# Altium PCB hand_sense.PcbDoc
Units mil, origin at the board's own origin, x right, y up, seen from the top; angles counter-clockwise.
Board outline 3797.46 x 1463.31 mil, 4 copper layers (Top Layer, Int1 (GND), Int2 (PWR), Bottom Layer), stack 53.912 mil thick; 72 components, 54 nets, 328 pads, 179 vias.
Unrouted connection lines stored in the file: 152.
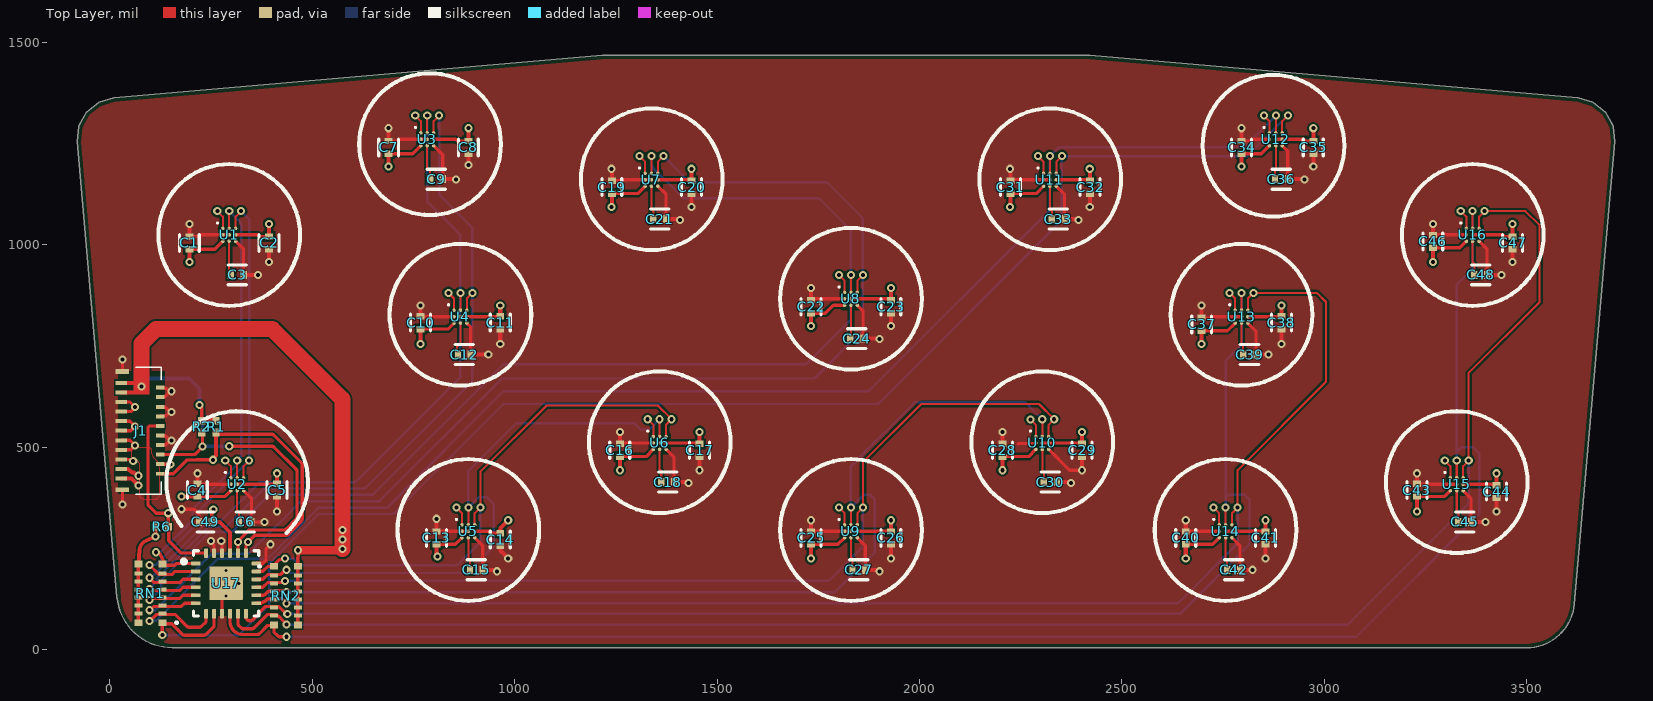
[diagram p0: Top Layer view]
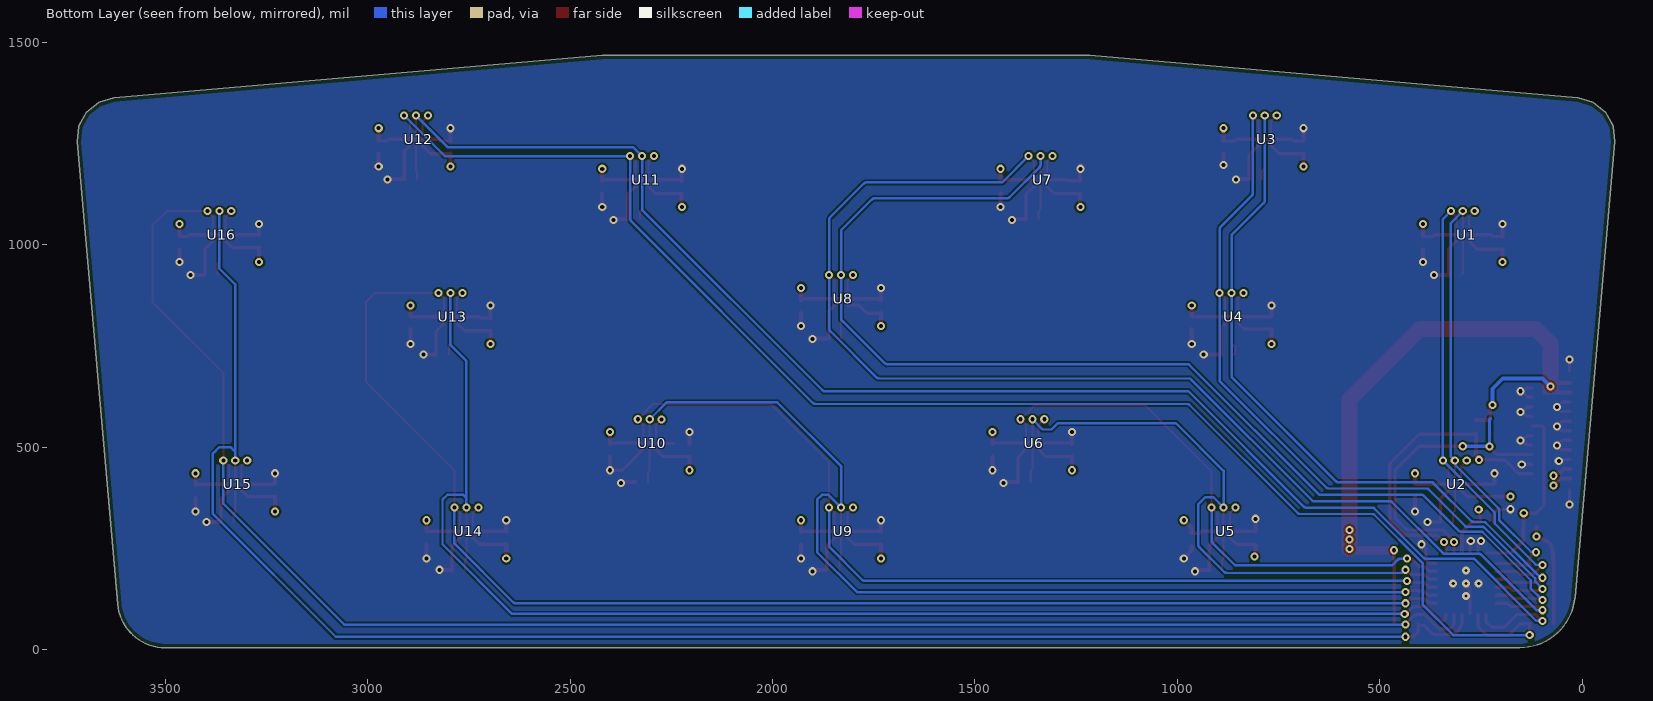
[diagram p1: Bottom Layer view, seen from below]
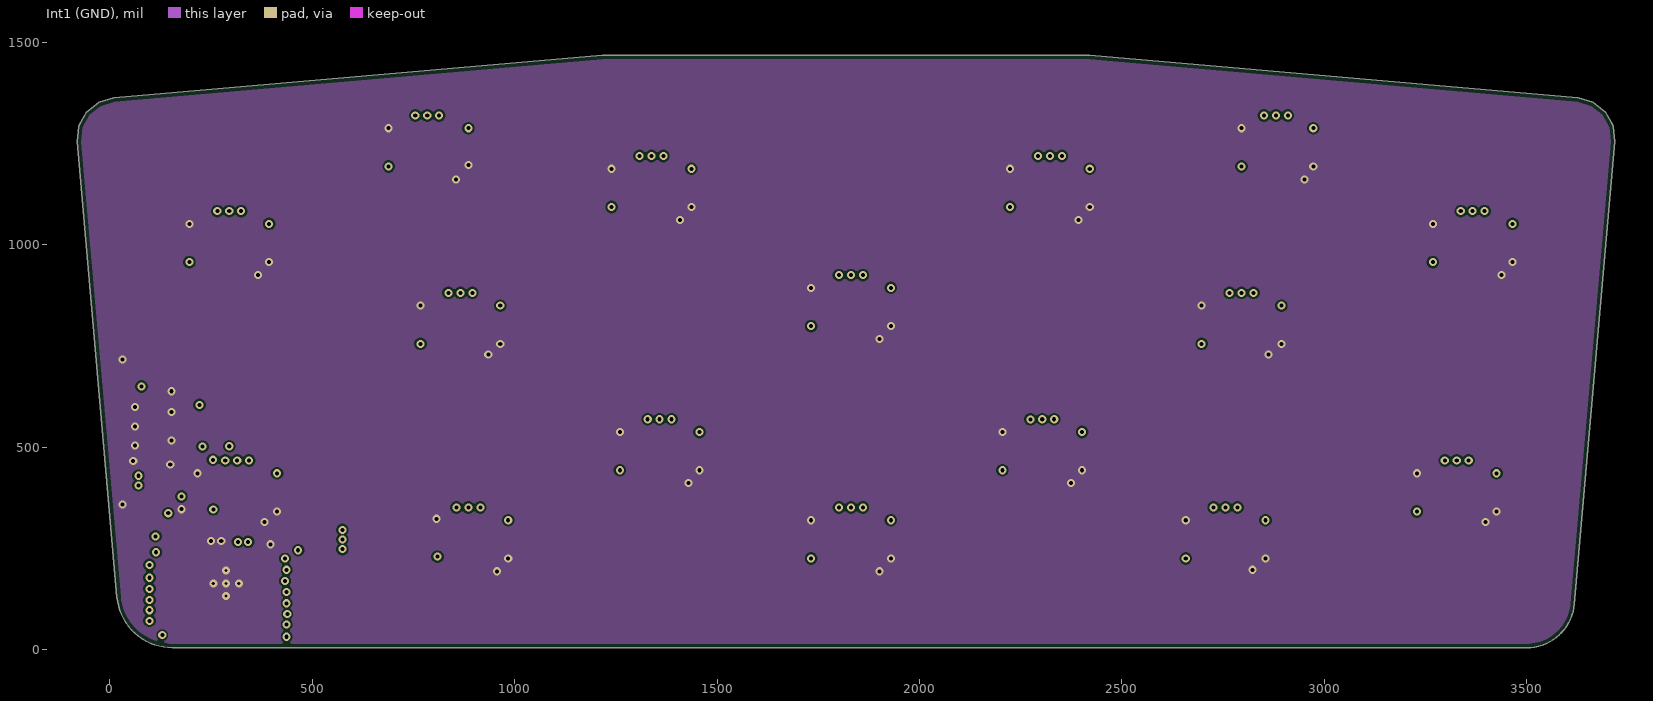
[diagram p2: Int1 (GND)]
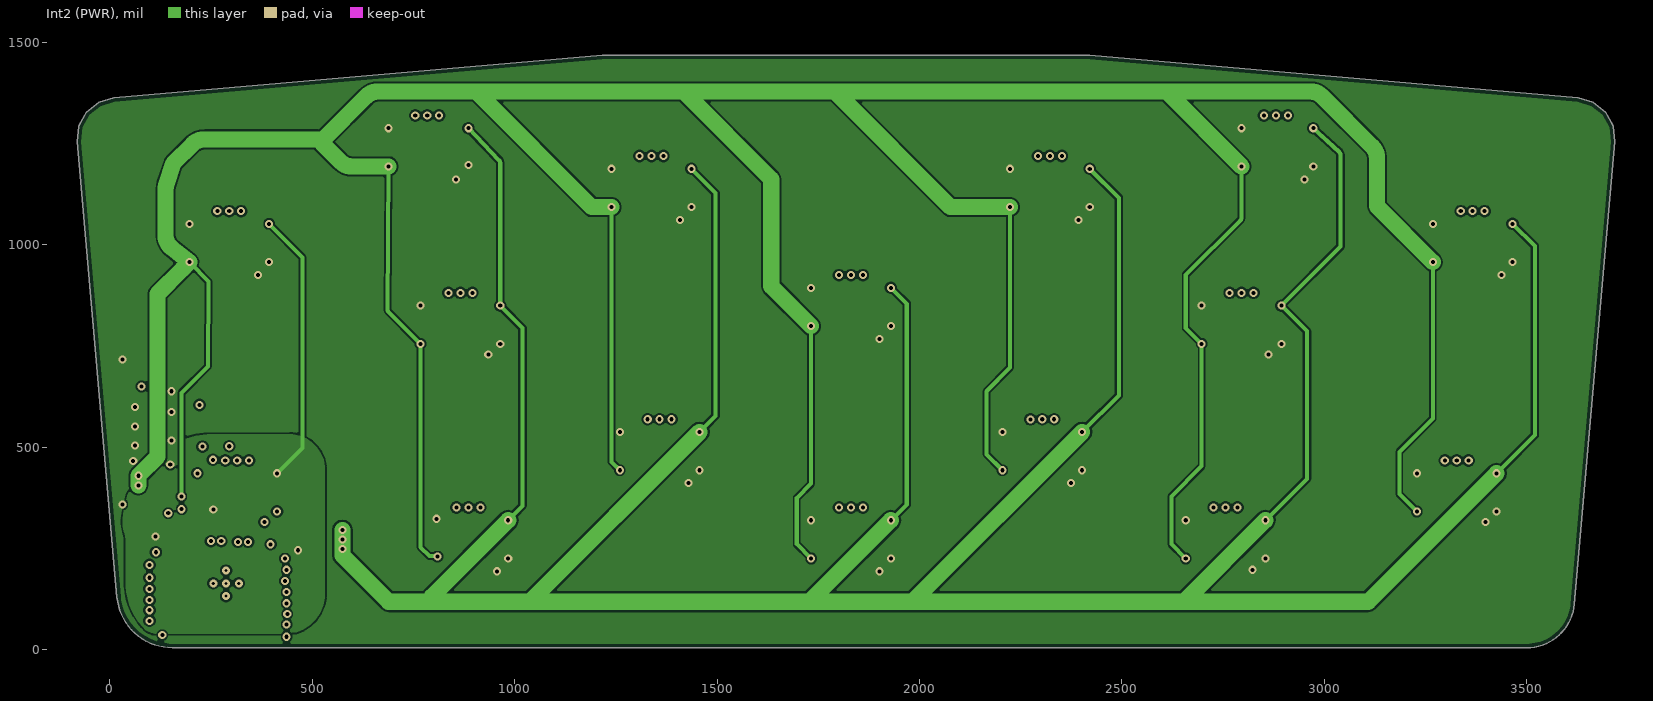
[diagram p3: Int2 (PWR)]
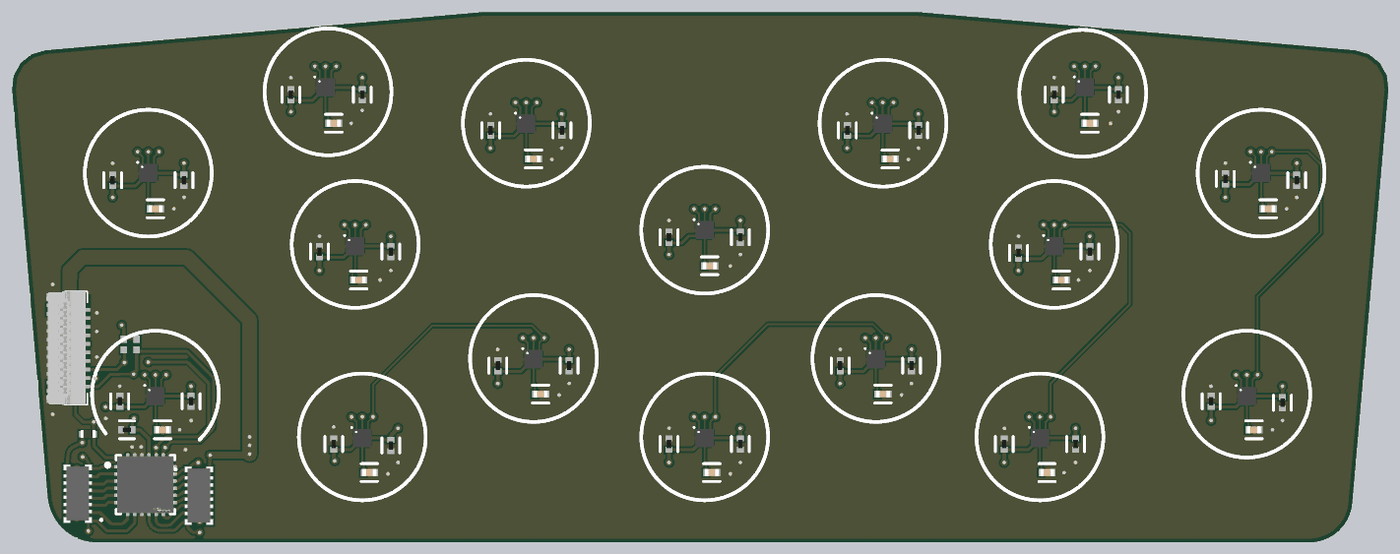
[diagram p4: 3D render of the assembled board from above, using the file's embedded part models]

## Layer stack, top to bottom
Top Solder: solder mask 1, SM-001, Dk 4
Top Layer: signal copper 1.378
Dielectric 1: prepreg 5.1, PP-017, Dk 4.3
Dielectric 2: prepreg 5.1, PP-017, Dk 4.3
Int1 (GND): signal copper 1.378
Dielectric 3: core 28, Core-039, Dk 4.8
Int2 (PWR): signal copper 1.378
Dielectric 4: prepreg 5.1, PP-017, Dk 4.3
Dielectric 5: prepreg 5.1, PP-017, Dk 4.3
Bottom Layer: signal copper 1.378
Bottom Solder: solder mask 1, SM-001, Dk 4

## Board outline
154.76,4.49 3499.51,4.49 ccw(c3499.51,122.78) 3617.35,112.47 3717.18,1253.6 3712.92,1292.54 3694.08,1326.88 3663.53,1351.4 3625.92,1362.36 2420.81,1467.8 1216.09,1467.8 10.98,1362.36 -26.62,1351.4 -57.17,1326.88 -76.01,1292.54 -80.28,1253.6 18.04,129.76 ccw(c154.75,141.72)

## Design rules (kind name [scope] priority, off if disabled: settings)
BoardOutlineClearance [All] p1: gap=10 ignorepadtopadclearanceinfootprint=FALSE
Clearance [All] p1: gap=5 ignorepadtopadclearanceinfootprint=FALSE
PlaneClearance [All] p1: clearance=10
PlaneConnect [All] p1: planeconnectstyle=Direct reliefexpansion=20 reliefentries=4 reliefconductorwidth=10 reliefairgap=10
PolygonConnect [All] p1: connectstyle=Direct reliefconductorwidth=10 reliefentries=4 polygonreliefangle="90 Angle" airgapwidth=10
RoutingVias [All] p1: holewidth=10 width=20 viastyle="Through Hole" minholewidth=10 minwidth=20 maxholewidth=50 maxwidth=100
SolderMaskExpansion [All] p1: expansion=4 istentingtop=TRUE
Width [All] p1: maxlimit=40 minlimit=5 preferedwidth=10
28 further rules are at their usual default settings.

## Classes and differential pairs
component class CONNECTOR: J1
component class SENSE: C1 C2 C3 C4 C5 C6 C7 C8 C9 C10 C11 C12 C13 C14 C15 C16 C17 C18 C19 C20 C21 C22 C23 C24 C25 C26 C27 C28 C29 C30 C31 C32 C33 C34 C35 C36 C37 C38 C39 C40 C41 C42 C43 C44 C45 C46 C47 C48 U1 U2 U3 U4 U5 U6 U7 U8 U9 U10 U11 U12 U13 U14 U15 U16
component class LOGIC: C49 R1 R2 R6 RN1 RN2 U17

## Components (designator, comment, footprint, x,y, rotation, side; value= is the part's Value field where it differs from the comment)
C1 "0.1uF" FP-GRM15-MFG 196.85,1003.94 r270 top value=0.10μF
C2 "0.1uF" FP-GRM15-MFG 393.7,1003.94 r90 top value=0.10μF
C3 "2.2uF" FP-C1005-050-0_15-0_1-MFG 314.96,925.2 r0 top
C4 "0.1uF" FP-GRM15-MFG 216.54,393.7 r270 top value=0.10μF
C5 "0.1uF" FP-GRM15-MFG 413.39,393.7 r90 top value=0.10μF
C6 "2.2uF" FP-C1005-050-0_15-0_1-MFG 334.65,314.96 r0 top
C7 "0.1uF" FP-GRM15-MFG 688.98,1240.16 r270 top value=0.10μF
C8 "0.1uF" FP-GRM15-MFG 885.83,1240.16 r90 top value=0.10μF
C9 "2.2uF" FP-C1005-050-0_15-0_1-MFG 807.09,1161.42 r0 top
C10 "0.1uF" FP-GRM15-MFG 767.72,807.09 r270 top value=0.10μF
C11 "0.1uF" FP-GRM15-MFG 964.57,807.09 r90 top value=0.10μF
C12 "2.2uF" FP-C1005-050-0_15-0_1-MFG 875.98,728.35 r0 top
C13 "0.1uF" FP-GRM15-MFG 807.09,275.59 r270 top value=0.10μF
C14 "0.1uF" FP-GRM15-MFG 964.57,271.65 r90 top value=0.10μF
C15 "2.2uF" FP-C1005-050-0_15-0_1-MFG 905.51,196.85 r0 top
C16 "0.1uF" FP-GRM15-MFG 1259.84,492.13 r270 top value=0.10μF
C17 "0.1uF" FP-GRM15-MFG 1456.69,492.13 r90 top value=0.10μF
C18 "2.2uF" FP-C1005-050-0_15-0_1-MFG 1377.95,413.39 r0 top
C19 "0.1uF" FP-GRM15-MFG 1240.16,1141.73 r270 top value=0.10μF
C20 "0.1uF" FP-GRM15-MFG 1437.01,1141.73 r90 top value=0.10μF
C21 "2.2uF" FP-C1005-050-0_15-0_1-MFG 1358.27,1062.99 r0 top
C22 "0.1uF" FP-GRM15-MFG 1732.28,846.46 r270 top value=0.10μF
C23 "0.1uF" FP-GRM15-MFG 1929.13,846.46 r90 top value=0.10μF
C24 "2.2uF" FP-C1005-050-0_15-0_1-MFG 1844.49,767.72 r0 top
C25 "0.1uF" FP-GRM15-MFG 1732.28,275.59 r270 top value=0.10μF
C26 "0.1uF" FP-GRM15-MFG 1929.13,275.59 r90 top value=0.10μF
C27 "2.2uF" FP-C1005-050-0_15-0_1-MFG 1850.39,196.85 r0 top
C28 "0.1uF" FP-GRM15-MFG 2204.72,492.13 r270 top value=0.10μF
C29 "0.1uF" FP-GRM15-MFG 2401.57,492.13 r90 top value=0.10μF
C30 "2.2uF" FP-C1005-050-0_15-0_1-MFG 2322.83,413.39 r0 top
C31 "0.1uF" FP-GRM15-MFG 2224.41,1141.73 r270 top value=0.10μF
C32 "0.1uF" FP-GRM15-MFG 2421.26,1141.73 r90 top value=0.10μF
C33 "2.2uF" FP-C1005-050-0_15-0_1-MFG 2342.52,1062.99 r0 top
C34 "0.1uF" FP-GRM15-MFG 2795.28,1240.16 r270 top value=0.10μF
C35 "0.1uF" FP-GRM15-MFG 2972.44,1240.16 r90 top value=0.10μF
C36 "2.2uF" FP-C1005-050-0_15-0_1-MFG 2893.7,1161.42 r0 top
C37 "0.1uF" FP-GRM15-MFG 2696.85,803.15 r270 top value=0.10μF
C38 "0.1uF" FP-GRM15-MFG 2893.7,807.09 r90 top value=0.10μF
C39 "2.2uF" FP-C1005-050-0_15-0_1-MFG 2814.96,728.35 r0 top
C40 "0.1uF" FP-GRM15-MFG 2657.48,275.59 r270 top value=0.10μF
C41 "0.1uF" FP-GRM15-MFG 2854.33,275.59 r90 top value=0.10μF
C42 "2.2uF" FP-C1005-050-0_15-0_1-MFG 2775.59,196.85 r0 top
C43 "0.1uF" FP-GRM15-MFG 3228.35,393.7 r270 top value=0.10μF
C44 "0.1uF" FP-GRM15-MFG 3425.2,389.76 r90 top value=0.10μF
C45 "2.2uF" FP-C1005-050-0_15-0_1-MFG 3346.46,314.96 r0 top
C46 "0.1uF" FP-GRM15-MFG 3267.72,1007.87 r270 top value=0.10μF
C47 "0.1uF" FP-GRM15-MFG 3464.57,1003.94 r90 top value=0.10μF
C48 "2.2uF" FP-C1005-050-0_15-0_1-MFG 3385.83,925.2 r0 top
C49 "0.1uF" FP-GRM15-MFG 236.22,314.96 r180 top value=0.10μF
J1 "503566-2102" 5035662102 74.8,540.35 r270 top
R1 "DNP" RESC1005X40X25LL05T10 262.8,550.2 r90 top
R2 "DNP" RESC1005X40X25LL05T10 227.36,550.2 r90 top
R6 "4.7K" RESC1005X40X25LL05T05 128.94,303.15 r180 top
RN1 "EXB-2HV102JV" EXB2HV102JV 100.39,138.54 r90 top
RN2 "EXB-2HV102JV" EXB2HV102JV 435.04,133.11 r270 top
U1 "BMM350" BMM350 295.28,1024 r0 top
U2 "BMM350" BMM350 314.96,408 r0 top
U3 "BMM350" BMM350 784.25,1260 r0 top
U4 "BMM350" BMM350 866.14,822 r0 top
U5 "BMM350" BMM350 885.83,292 r0 top
U6 "BMM350" BMM350 1358.27,510 r0 top
U7 "BMM350" BMM350 1338,1160 r0 top
U8 "BMM350" BMM350 1830.71,866 r0 top
U9 "BMM350" BMM350 1830.71,292 r0 top
U10 "BMM350" BMM350 2303.15,510 r0 top
U11 "BMM350" BMM350 2322,1160 r0 top
U12 "BMM350" BMM350 2880,1260 r0 top
U13 "BMM350" BMM350 2795.28,822 r0 top
U14 "BMM350" BMM350 2755.91,292 r0 top
U15 "BMM350" BMM350 3326.77,408 r0 top
U16 "BMM350" BMM350 3366.14,1024 r0 top
U17 "TCA9548ARGER" FP-RGE0024C-MFG 287.4,163.39 r0 top

## Footprints (in the part's own frame and the unit in brackets; to place one, negate y for a bottom-side part, rotate by r counter-clockwise, add the part's x,y. Pads: shape width x height; smd on the part's side, far side on the other; paste and mask are expansions set on the pad)
5035662102 [mm]
  rect 0.25x0.72 smd: 1(-3,-1.165) 3(-2.4,-1.165) 5(-1.8,-1.165) 7(-1.2,-1.165) 9(-0.6,-1.165) 11(0,-1.165) 13(0.6,-1.165) 15(1.2,-1.165) 17(1.8,-1.165) 19(2.4,-1.165) 21(3,-1.165)
  rect 0.25x0.52 smd: 2(-2.7,1.265) 4(-2.1,1.265) 6(-1.5,1.265) 8(-0.9,1.265) 10(-0.3,1.265) 12(0.3,1.265) 14(0.9,1.265) 16(1.5,1.265) 18(2.1,1.265) 20(2.7,1.265)
  rect 0.3x0.85 smd: MP1(-3.71,-1.1) MP2(3.71,-1.1)
  silkscreen extent -3.98,-0.25 3.98,1.33, body extent -3.98,-1.54 3.98,1.31, height 0.95
BMM350 [mm] "BGA, 9-Leads, Body 1.28x1.28mmx0.50mm, Pitch 0.40mm"
  round 0.22 smd: A1(-0.4,0.4) A2(0,0.4) A3(0.4,0.4) B1(-0.4,0) B2(0,0) B3(0.4,0) C1(-0.4,-0.4) C2(0,-0.4) C3(0.4,-0.4)
  silkscreen extent -0.79,0.7 -0.69,0.79, body extent -0.64,-0.64 0.64,0.64, height 0.5
EXB2HV102JV [mm]
  rect 0.425x0.5 smd: 1(-1.838,-0.75) 8(1.838,-0.75) 9(1.838,0.75) 16(-1.838,0.75)
  rect 0.25x0.5 smd: 2(-1.251,-0.75) 3(-0.751,-0.75) 4(-0.251,-0.75) 5(0.249,-0.75) 6(0.749,-0.75) 7(1.249,-0.75) 10(1.249,0.75) 11(0.749,0.75) 12(0.249,0.75) 13(-0.251,0.75) 14(-0.751,0.75) 15(-1.251,0.75)
  silkscreen extent -1.89,-1.7 -1.79,-1.6, body extent -2.01,-0.97 2.01,0.97, height 0.65
FP-C1005-050-0_15-0_1-MFG [mm]
  rect 0.4x0.5 smd paste+0 mask+0: 1(-0.4,0) 2(0.4,0)
  silkscreen extent -0.58,-0.63 0.58,0.63, body extent -0.7,-0.4 0.7,0.4, height 0.25
FP-GRM15-MFG [mm]
  rect 0.4x0.5 smd paste+0 mask+0: 1(-0.4,0) 2(0.4,0)
  silkscreen extent -0.53,-0.63 0.53,0.63, body extent -0.7,-0.38 0.7,0.38, height 0.25
FP-RGE0024C-MFG [mm]
  rrect42% 0.6x0.24 smd paste-1000 mask+0: 1(-1.9,1.25) 2(-1.9,0.75) 3(-1.9,0.25) 4(-1.9,-0.25) 5(-1.9,-0.75) 6(-1.9,-1.25) 13(1.9,-1.25) 14(1.9,-0.75) 15(1.9,-0.25) 16(1.9,0.25) 17(1.9,0.75) 18(1.9,1.25)
  rrect42% 0.24x0.6 smd paste-1000 mask+0: 7(-1.25,-1.9) 8(-0.75,-1.9) 9(-0.25,-1.9) 10(0.25,-1.9) 11(0.75,-1.9) 12(1.25,-1.9) 19(1.25,1.9) 20(0.75,1.9) 21(0.25,1.9) 22(-0.25,1.9) 23(-0.75,1.9) 24(-1.25,1.9)
  rrect5% 2.1x2.1 smd paste-1000 mask+0: 25(0,0)
  silkscreen extent -2.77,-2.05 2.05,2.05, body extent -2.01,-2.01 2.01,2.01, height 1
RESC1005X40X25LL05T05 [mm] "Chip Resistor, 2-Leads, Body 1.05x0.55mm, IPC High Density"
  rect 0.45x0.45 smd: 1(-0.4,0) 2(0.4,0)
  body extent -0.53,-0.28 0.53,0.28, height 0.4
RESC1005X40X25LL05T10 [mm] "Chip Resistor, 2-Leads, Body 1.00x0.50mm, IPC High Density"
  rect 0.5x0.45 smd: 1(-0.375,0) 2(0.375,0)
  body extent -0.53,-0.27 0.53,0.28, height 0.4

## Part data
C1 C2 C4 C5 C7 C8 C10 C11 C13 C14 C16 C17 C19 C20 C22 C23 C25 C26 C28 C29 C31 C32 C34 C35 C37 C38 C40 C41 C43 C44 C46 C47 C49: library part CMP-2100-03641-2, "CAP CER 0.1UF 16V X7R 0402", Capacitance=0.10μF, Manufacturer=Murata, Manufacturer Part Number=GRM155R71C104KA88D, Package=GRM15, Temperature="-55°C to +125°C", Temperature Characteristic=X7R, Temperature Range High=+125°C, Temperature Range Low=-55°C, Tolerance=10%, Voltage Rating=16Vdc, Category=Cap, ComponentLink2Description=Datasheet, ComponentLink2URL=https://search.murata.co.jp/Ceramy/image/img/A01X/G101/ENG/GRM155R71H471KA01-01A.pdf, Device Class L1="Passive Components", Device Class L2=Capacitors, Device Class L3="Ceramic Capacitors", Digikey Description="CAP CER 0.1UF 16V X7R 0402", Height=0.55mm, Ipc Land Pattern Name=CAPC10050X219, Lead Free=yes, Material=Ceramic, Mouser Description="0402 0.1 uF 16V ±10 % Tolerance X7R SMT Multilayer Ceramic Capacitor", Octopart=https://octopart.com/grm155r71c104ka88d-murata-196880, RoHS=TRUE, Standoff Height=0mm
C3 C6 C9 C12 C15 C18 C21 C24 C27 C30 C33 C36 C39 C42 C45 C48: library part CMP-08246-004344-1, "CAP CER 2.2UF 10V X7S 0402", Case Code (Imperial)=0402, Case Code (Metric)=1005, Dielectric=X7S, Dielectric Material=Ceramic, Max Operating Temperature=125°C, Min Operating Temperature=-55°C, Package Quantity=1, Tolerance=10%, Voltage Rating=10V, Capacitance=2.2uF, Case/Package=0402, Depth=0.5mm, Height=0.5mm, Lead Free="Lead Free", Length=1mm, Mount="Surface Mount", Packaging="Tape and Reel", Resistor Type=Ceramic, RoHS Compliant=Yes, Series=C, Termination=SMD/SMT, Thickness=0.022inch, Voltage Rating (DC)=10V, Weight=2.3E-05oz, Width=0.02inch
J1: "Connector", Manufacturer_Name=Molex, Mouser Part Number=538-503566-2102, Datasheet Link=https://www.molex.com/pdm_docs/sd/5035662102_sd.pdf, Height=1.69mm, Manufacturer_Part_Number=503566-2102, Mouser Price/Stock=https://www.mouser.co.uk/ProductDetail/Molex/503566-2102?qs=0lSvoLzn4L8%252Bw2FHrppS3g%3D%3D
R1 R2: library part CMP-2002-07941-1, Manufacturer="Yageo / Phycomp", Part Number=RC0402JR-071KL
R6: library part CMP-2002-01154-4, "Chip Resistor, 4.7 KOhm, +/- 1%, 0.1 W, -55 to 155 degC, 0402 (1005 Metric), RoHS, Tape and Reel", Case Code (Imperial)=0402, Case Code (Metric)=1005, Max Operating Temperature="155 degC", Min Operating Temperature="-55 degC", Package Quantity=1, PartNumber=ERJ-2RKF4701X, Power Rating="100 mW", Resistance="4.7 KOhm", Tolerance=1%, Voltage Rating="50 V", Case\/Package=0402, ComponentLink1Description="Manufacturer URL", ComponentLink1URL=http://www.panasonic.com/, ComponentLink2Description=Datasheet, ComponentLink2URL=http://industrial.panasonic.com/cdbs/www-data/pdf/RDA0000/AOA0000C86.pdf, DatasheetVersion=04/2015, Height="0.35 mm", Length="1 mm", Mount="Surface Mount", Mounting Technology="Surface Mount", PackageDescription="2-Pin Surface Mount Device, Body 1 x 0.5 mm", PackageReference=0402, Packaging="Cut Tape", Pins=2, Radiation Hardening=No, REACH SVHC=Yes, RoHSCompliant=true, Width="0.5 mm"
RN1 RN2: "Resistor Network", Manufacturer_Name=Panasonic, Mouser Part Number=667-EXB-2HV102JV, Arrow Part Number=EXB-2HV102JV, Arrow Price/Stock=https://www.arrow.com/en/products/exb-2hv102jv/panasonic?region=nac, Datasheet Link=https://industrial.panasonic.com/cdbs/www-data/pdf/AOC0000/AOC0000C14.pdf, Height=0.55mm, Manufacturer_Part_Number=EXB-2HV102JV, Mouser Price/Stock=https://www.mouser.co.uk/ProductDetail/Panasonic/EXB-2HV102JV?qs=oE3VwAv%2FYtkhk%252Bvg87pJMg%3D%3D
U17: library part CMP-04892-000041-1, "IC I2C SW 8CH W/RESET 24VQFN", Case/Package=VQFN, Max Operating Temperature=85°C, Max Supply Current=80uA, Max Supply Voltage=5.5V, Min Operating Temperature=-40°C, Min Supply Voltage=1.65V, On-State Resistance=70R, Package Quantity=3000, Independent Circuits=1, Lead Free="Lead Free", Mount="Surface Mount", Number of Pins=24, Packaging="Tape and Reel", Propagation Delay=1ns, Radiation Hardening=No, REACH SVHC="No SVHC", RoHS Compliant=Yes, Supply Type=Single, Weight=0.001926oz

## Via types
v1: diameter 20, hole 10, Top Layer to Bottom Layer, tented both sides, 174 vias
v2: diameter 19.68, hole 7.87, Top Layer to Bottom Layer, 5 vias

## Nets (pads, with @x,y where several pads share a name; then routed paths per layer and width w, separated by ;. In a path a pad name is that pad's centre, name@x,y a point inside that pad or via, vN(x,y) a via of type N, cw(c..) or ccw(c..) an arc to the next point about the centre after c; other vN are vias at no path point)
1V8: C1.2 C4.2 C7.2 C10.2 C13.2 C16.2 C19.2 C22.2 C25.2 C28.2 C31.2 C34.2 C37.2 C40.2 C43.2 C46.2 J1.19 J1.21 U1.C1 U2.C1 U3.C1 U4.C1 U5.C1 U6.C1 U7.C1 U8.C1 U9.C1 U10.C1 U11.C1 U12.C1 U13.C1 U14.C1 U15.C1 U16.C1 | length 13872.7
  Top Layer w8: C1.2 259.46,988.19 U1.C1 ; C4.2 284.91,377.95 U2.C1 ; C7.2 748.66,1224.41 U3.C1 ; C10.2 835.48,791.34 U4.C1 ; C13.2 853.67,259.84 U5.C1 ; C19.2 1303.98,1125.98 U7.C1 ; C16.2 1324.65,476.38 U6.C1 ; C25.2 1798.55,259.84 U9.C1 ; C22.2 1767.72,830.71 1787.26,850.25 U8.C1 ; C28.2 2269.53,476.38 U10.C1 ; C31.2 2287.98,1125.98 U11.C1 ; C40.2 2723.75,259.84 U14.C1 ; C37.2 2760.68,787.4 U13.C1 ; C34.2 2844.41,1224.41 U12.C1 ; C43.2 3296.72,377.95 U15.C1 ; C46.2 3334.27,992.13 U16.C1
  Top Layer w10: J1.21 54.13,422.24 v1(70.87,405.51) ; J1.19 45.53,445.87 54.71,436.69 60.6,436.69 68.16,429.13 v1(70.87,429.13) ; v1(177.17,377.95) C4.2 ; v1(196.85,956.69) C1.2 ; v1@688.98,1202.69 C7.2 ; v1(767.72,754.69) C10.2 ; C13.2 807.09,234.61 809.65,232.05 v1(809.65,229.35) ; v1(1239.57,1092.69) 1240.16,1093.28 C19.2 ; v1(1259.84,442.69) C16.2 ; v1(1732.28,224.69) C25.2 ; v1(1732.28,798.69) C22.2 ; v1(2204.72,442.69) C28.2 ; v1(2223.57,1092.69) 2224.41,1093.53 C31.2 ; v1(2657.48,224.69) C40.2 ; v1(2696.85,754.69) C37.2 ; v1(2795.28,1192.91) 2795.05,1204.37 cw(c2805.05,1204.51) 2795.16,1205.97 ccw(c2785.28,1207.51) 2795.28,1207.51 C34.2 ; v1(3228.35,340.69) C43.2 ; v1(3267.72,956.69) C46.2
  Int2 (PWR) w10: v1(177.17,377.95) 177.17,633.86 242.61,699.31 244.09,908.78 v1(196.85,956.69) ; 688.79,833.62 v1(767.72,754.69) 767.72,270.46 ; 688.76,833.65 cw(c695.86,840.69) 685.86,840.74 v1(688.98,1192.91) ; 767.72,270.41 767.72,252.49 789.34,230.87 808.13,230.87 v1(809.65,229.35) ; v1(1239.57,1092.69) 1239.57,462.96 v1(1259.84,442.69) ; v1(1732.28,224.69) 1696.85,260.13 1696.85,374.02 1732.28,409.45 v1(1732.28,798.69) ; v1(2204.72,442.69) 2165.35,482.06 2165.35,637.8 2223.57,696.02 v1(2223.57,1092.69) ; v1(2657.48,224.69) 2622.05,260.13 2622.05,377.95 2696.85,452.76 v1(2696.85,754.69) 2657.48,794.06 2657.48,925.2 2792.35,1060.06 ccw(c2785.28,1067.13) 2795.28,1067.13 v1(2795.28,1192.91) ; v1(3228.35,340.69) 3185.04,384 3185.04,488.19 3267.72,570.87 v1(3267.72,956.69)
  Int2 (PWR) w40: v1(70.87,405.51) v1(70.87,429.13) 118.11,476.38 118.11,877.95 179.03,938.87 184.02,943.86 v1(196.85,956.69) 152.81,991.93 152.72,992 cw(c177.8,1023.16) 137.8,1023.16 137.8,1135.24 137.8,1135.33 cw(c177.8,1135.24) 139.82,1147.82 157.48,1200.79 204.82,1248.13 cw(c233.1,1219.84) 233.1,1259.84 514.84,1259.84 ; v1(688.98,1192.91) 598.21,1192.91 cw(c598.33,1232.91) 570.15,1204.53 533.01,1241.67 514.84,1259.84 ; v1(1239.57,1092.69) 1190.77,1092.69 905.51,1377.95 ; v1(1732.28,798.69) 1633.86,897.12 1633.86,1161.42 1417.32,1377.95 ; v1(2223.57,1092.69) 2076.6,1092.69 1791.34,1377.95 ; v1(2795.28,1192.91) 2610.24,1377.95 ; v1(3267.72,956.69) 3129.92,1094.49 3129.92,1213.75 3129.92,1213.84 ccw(c3089.92,1213.75) 3118.25,1241.99 2993.93,1366.31 ccw(c2965.71,1337.95) 2965.71,1377.95 2610.24,1377.95 ; 514.84,1259.84 cw(c515.06,1219.84) 526.05,1258.3 634.03,1366.28 cw(c662.27,1337.95) 662.18,1377.95 662.27,1377.95 905.51,1377.95 ; 905.51,1377.95 1417.32,1377.95 ; 1417.32,1377.95 1791.34,1377.95 ; 1791.34,1377.95 2610.24,1377.95
3V3: C2.2 C5.2 C8.2 C11.2 C14.2 C17.2 C20.2 C23.2 C26.2 C29.2 C32.2 C35.2 C38.2 C41.2 C44.2 C47.2 C49.1 J1.1 J1.3 R1.2 R2.2 R6.2 RN1.9 RN1.10 RN1.11 RN1.12 RN1.13 RN1.14 RN1.15 RN1.16 RN2.9 RN2.10 RN2.11 RN2.12 RN2.13 RN2.14 RN2.15 RN2.16 U1.B3 U2.B2 U2.B3 U3.B3 U4.B2 U4.B3 U5.B3 U6.B2 U6.B3 U7.B3 U8.B2 U8.B3 U9.B3 U10.B2 U10.B3 U11.B3 U12.B2 U12.B3 U13.B3 U14.B2 U14.B3 U15.B3 U16.B2 U16.B3 U17.21 | length 14676.3
  Top Layer w8: C49.1 251.97,338.84 255.91,342.78 v1(255.91,346.02) ; U1.B3 365.76,1024 370.08,1019.68 C2.2 ; U2.B2 U2.B3 411.94,408 C5.2 ; U3.B3 854.17,1260 858.27,1255.91 C8.2 ; U4.B2 U4.B3 963.73,822 C11.2 ; U5.B3 940.28,292 944.88,287.4 C14.2 ; U7.B3 1434.49,1160 C20.2 ; U6.B2 U6.B3 1454.57,510 C17.2 ; U8.B2 U8.B3 1925.34,866 C23.2 ; U9.B3 1928.47,292 C26.2 ; U10.B2 U10.B3 2399.45,510 C29.2 ; U11.B3 2418.74,1160 C32.2 ; U14.B2 U14.B3 2853.67,292 C41.2 ; U13.B3 2892.87,822 C38.2 ; U12.B2 U12.B3 2948.66,1260 2952.76,1255.91 C35.2 ; U15.B3 3422.71,408 C44.2 ; U16.B2 U16.B3 3440.57,1024 3444.88,1019.68 C47.2
  Top Layer w9: RN1.16@70.87,63.5 RN1.14@70.87,106.3 ; RN1.13@70.87,125.98 RN1.14@70.87,106.3 ; RN1.12@70.87,145.67 RN1.14@70.87,106.3 ; R6.2 113.19,298.79 v1(113.19,279.53) 89.43,268.56 ccw(c100.82,243.79) 73.62,245.72 71.21,212.9 ccw(c80.19,212.3) 71.19,212.3 71.19,212.06 70.87,208.19 RN1.14@70.87,106.3 ; v1(221.94,603.73) 221.94,600.76 227.36,595.34 227.36,566.93 R1.2@262.8,566.93 ; C49.1 271.65,314.96 297.24,289.37 U17.21 ; RN2.9@464.57,63.46 464.57,208.15 464.69,212.02 464.69,212.63 v1(465.55,245.08) ; v1@568.87,245.08 571.83,248.03 v1(574.8,248.03)
  Top Layer w10: J1.3 63.98,634.84 74.8,645.67 62.01,658.46 J1.1 ; C2.2 v1(393.7,1051.18) ; C5.2 v1(413.39,435.18) ; C8.2 885.83,1277.18 ccw(c875.83,1277.18) 885.8,1277.91 885.38,1283.63 cw(c895.35,1284.36) v1(885.83,1287.4) ; C14.2 964.57,295.35 cw(c974.57,295.35) 967.48,302.41 v1(984.25,319.18) ; C11.2 v1(964.57,849.18) ; v1(1436.43,1187.18) 1437.01,1186.6 C20.2 ; C17.2 v1(1456.69,537.18) ; C26.2 v1(1929.13,319.18) ; C23.2 v1(1929.13,893.18) ; C29.2 v1(2401.57,537.18) ; v1(2420.43,1187.18) 2421.26,1186.35 C32.2 ; C41.2 v1(2854.33,319.18) ; C38.2 v1(2893.7,849.18) ; C35.2 2972.44,1278.49 ccw(c2963.49,1282.95) v1(2972.44,1287.4) ; C44.2 v1(3425.2,435.18) ; C47.2 v1(3464.57,1051.18)
  Top Layer w20: v1(465.55,245.08) v1@568.87,245.08
  Top Layer w40: 78.74,732.28 78.74,755.91 114.17,791.34 401.57,791.34 574.8,618.11 v1(574.8,295.28) v1(574.8,271.65) v1(574.8,248.03)
  Int2 (PWR) w10: v1(393.7,1051.18) 476.38,968.5 476.38,498.17 v1(413.39,435.18) ; v1(885.83,1287.4) 961.78,1208.19 cw(c954.57,1201.27) 964.57,1201.32 ; 964.57,1201.27 v1(964.57,849.18) 1019.68,794.06 1019.68,354.61 v1(984.25,319.18) ; v1(1436.43,1187.18) 1496.06,1127.54 1496.06,576.55 v1(1456.69,537.18) ; v1(1929.13,319.18) 1968.5,358.55 1968.5,853.81 v1(1929.13,893.18) ; v1(2401.57,537.18) 2492.13,627.73 2492.13,1115.48 v1(2420.43,1187.18) ; v1(2854.33,319.18) 2956.69,421.54 2956.69,786.19 v1(2893.7,849.18) 3039.37,994.85 3039.37,1221.83 ; v1(2972.44,1287.4) 3036.12,1229.21 cw(c3029.37,1221.83) 3039.37,1221.87 ; v1(3425.2,435.18) 3519.68,529.67 3519.68,996.06 v1(3464.57,1051.18)
  Int2 (PWR) w40: v1(574.8,295.28) v1(574.8,271.65) v1(574.8,248.03) 574.8,232.28 688.98,118.11 1037.62,118.11 ; 795.13,130.06 v1(984.25,319.18) ; v1(1456.69,537.18) 1037.62,118.11 ; v1(1929.13,319.18) 1728.06,118.11 ; v1(2401.57,537.18) 1982.5,118.11 ; v1(2854.33,319.18) 2653.26,118.11 ; v1(3425.2,435.18) 3108.13,118.11 2653.26,118.11 ; 1037.62,118.11 1728.06,118.11 ; 1728.06,118.11 1982.5,118.11 ; 1982.5,118.11 2653.26,118.11
  Bottom Layer w9: v1(78.74,649.61) 98.43,669.29 196.85,669.29 221.94,644.2 v1(221.94,603.73)
A_INT: U1.A1 | length 48.6
  Top Layer w5: v1(265.75,1082.68) 279.53,1068.9 U1.A1
B_INT: U2.A1 | length 48.6
  Top Layer w5: v1(285.43,466.68) 299.21,452.9 U2.A1
C_INT: U3.A1 | length 48.6
  Top Layer w5: v1(754.72,1318.68) 768.5,1304.9 U3.A1
D_INT: U4.A1 | length 48.6
  Top Layer w5: v1(836.61,880.68) 850.39,866.9 U4.A1
E_INT: U5.A1 | length 48.6
  Top Layer w5: v1(856.3,350.68) 870.08,336.9 U5.A1
F_INT: U6.A1 | length 48.6
  Top Layer w5: v1(1328.74,568.68) 1342.52,554.9 U6.A1
G_INT: U7.A1 | length 48.6
  Top Layer w5: v1(1308.47,1218.68) 1322.25,1204.9 U7.A1
GND: C1.1 C2.1 C3.2 C4.1 C5.1 C6.2 C7.1 C8.1 C9.2 C10.1 C11.1 C12.2 C13.1 C14.1 C15.2 C16.1 C17.1 C18.2 C19.1 C20.1 C21.2 C22.1 C23.1 C24.2 C25.1 C26.1 C27.2 C28.1 C29.1 C30.2 C31.1 C32.1 C33.2 C34.1 C35.1 C36.2 C37.1 C38.1 C39.2 C40.1 C41.1 C42.2 C43.1 C44.1 C45.2 C46.1 C47.1 C48.2 C49.2 J1.2 J1.4 J1.5 J1.6 J1.7 J1.8 J1.9 J1.11 J1.12 J1.13 J1.14 J1.15 J1.17 J1.18 J1.MP1 J1.MP2 U1.B1 U1.B2 U1.C3 U2.B1 U2.C3 U3.B1 U3.B2 U3.C3 U4.B1 U4.C3 U5.B1 U5.B2 U5.C3 U6.B1 U6.C3 U7.B1 U7.B2 U7.C3 U8.B1 U8.C3 U9.B1 U9.B2 U9.C3 U10.B1 U10.C3 U11.B1 U11.B2 U11.C3 U12.B1 U12.C3 U13.B1 U13.B2 U13.C3 U14.B1 U14.C3 U15.B1 U15.B2 U15.C3 U16.B1 U16.C3 U17.9 U17.18 U17.22 U17.23 U17.25 | length 5223.4
  Top Layer w8: J1.17 51.3,469.49 54.89,465.9 v1(58.14,465.9) ; J1.15 52.17,493.11 v1(62.99,503.94) 50.2,516.73 J1.13 ; J1.11 52.17,540.35 v1(62.99,551.18) 50.2,563.98 J1.9 ; J1.7 52.17,587.6 v1(62.99,598.43) 50.2,611.22 J1.5 ; v1(31.5,358.27) J1.MP2 ; J1.MP1 v1(31.5,716.54) ; J1.18 124.9,457.38 148.92,457.38 v1(149.61,456.69) ; J1.14 125.53,505.84 138.92,505.84 148.83,515.75 v1@149.61,515.75 ; J1.12 125.53,527.62 137.73,527.62 143.8,521.55 144.06,521.55 149.86,515.75 v1(153.11,515.75) ; J1.8 125.53,576.71 138.92,576.71 148.83,586.61 v1@149.61,586.61 ; J1.6 125.53,598.49 137.73,598.49 143.8,592.42 144.06,592.42 149.86,586.61 v1(153.11,586.61) ; J1.4 125.53,623.95 135.76,623.95 143.8,631.99 144.06,631.99 149.86,637.8 v1(153.11,637.8) ; J1.2 125.53,645.73 138.92,645.73 146.86,637.8 v1@149.61,637.8 ; v1(177.73,346.46) 205.35,346.46 cw(c205.35,338.46) 211,344.11 220.47,334.65 C49.2 ; C1.1 220.47,1019.68 224.79,1024 U1.B1 U1.B2 ; C4.1 217.98,408 U2.B1 ; v1(250.36,267.49) 250.36,264.31 257.87,256.8 U17.23 ; v1(275.59,267.72) 276.79,265.17 cw(c269.56,261.76) 277.56,261.76 U17.22 ; U17.9 277.56,153.54 v2(287.4,163.39) ; U1.C3 330.71,988.57 C3.2 ; U2.C3 350.39,372.57 C6.2 v1(381.89,314.96) ; U17.18 362.5,212.9 378.25,212.9 385.85,220.5 385.85,248.06 v1(397.64,259.84) ; C7.1 712.6,1255.91 716.69,1260 U3.B1 U3.B2 ; C10.1 768.55,822 U4.B1 ; U3.C3 822.83,1221.42 C9.2 ; C13.1 807.75,292 U5.B1 U5.B2 ; U4.C3 891.73,796.41 C12.2 ; U5.C3 921.26,256.57 C15.2 ; C19.1 1267.72,1157.48 1270.24,1160 U7.B1 U7.B2 ; C16.1 1261.97,510 U6.B1 ; U7.C3 1374.02,1123.98 C21.2 ; U6.C3 1393.7,474.57 C18.2 ; C25.1 1732.94,292 U9.B1 U9.B2 ; C22.1 1736.08,866 U8.B1 ; U9.C3 1866.14,256.57 C27.2 ; U8.C3 1860.24,836.47 C24.2 ; C31.1 2226.93,1160 U11.B1 U11.B2 ; 2244.09,507.87 U10.B1 ; U10.C3 2370.46,442.69 v1(2401.57,442.69) ; U11.C3 2358.27,1123.73 C33.2 ; C40.1 2658.14,292 U14.B1 ; C37.1 2720.47,818.9 2723.57,822 U13.B1 U13.B2 ; U14.C3 2791.34,256.57 C42.2 ; C34.1 2818.9,1255.91 2822.99,1260 U12.B1 ; U13.C3 2830.71,786.57 C39.2 ; U12.C3 2909.45,1230.55 C36.2 ; C43.1 3229.8,408 U15.B1 U15.B2 ; C46.1 3268.09,1024 U16.B1 ; U15.C3 3362.2,372.57 C45.2 ; U16.C3 3401.57,988.57 C48.2
  Top Layer w10: C1.1 v1(196.85,1051.18) ; C4.1 v1(216.54,435.18) ; C3.2 v1(366.14,925.2) ; v1(393.7,956.69) C2.1 ; v1(413.39,340.69) C5.1 ; C7.1 688.98,1277.18 ccw(c678.98,1277.18) 688.95,1277.91 688.53,1283.63 cw(c698.5,1284.36) v1(688.98,1287.4) ; C10.1 v1(767.72,849.18) ; C13.1 v1(807.09,322.83) ; C9.2 854.9,1161.42 v1(855.12,1161.2) ; v1(885.83,1196.85) C8.1 ; C12.2 v1(935.04,728.35) ; C15.2 950.33,196.85 953.99,193.2 v1(956.69,193.2) ; C14.1 964.57,248.52 ccw(c974.57,248.52) 967.48,241.46 v1(984.25,224.69) ; v1(964.57,754.69) C11.1 ; v1(1239.57,1187.18) 1240.16,1186.6 C19.1 ; C16.1 v1(1259.84,537.18) ; C21.2 1407.07,1062.99 v1(1408.87,1061.2) ; C18.2 1424.24,413.39 1426.43,411.2 v1(1429.13,411.2) ; v1(1436.43,1092.69) 1437.01,1093.28 C20.1 ; v1(1456.69,442.69) C17.1 ; C25.1 v1(1732.28,319.18) ; C22.1 v1(1732.28,893.18) ; C24.2 1901.06,767.72 v1(1901.57,767.2) ; C27.2 1895.22,196.85 1898.87,193.2 v1(1901.57,193.2) ; v1(1929.13,224.69) C26.1 ; v1(1929.13,798.69) C23.1 ; C28.1 v1(2204.72,537.18) ; v1(2223.57,1187.18) 2224.41,1186.35 C31.1 ; C30.2 2369.12,413.39 2371.31,411.2 v1(2374.02,411.2) ; C33.2 2391.07,1062.99 v1(2392.87,1061.2) ; v1(2401.57,442.69) C29.1 ; v1(2420.43,1092.69) 2421.26,1093.53 C32.1 ; C40.1 v1(2657.48,319.18) ; C37.1 v1(2696.85,849.18) ; C42.2 v1(2822.83,196.85) ; C34.1 v1(2795.28,1287.4) ; C39.2 v1(2862.2,728.35) ; v1(2854.33,224.69) C41.1 ; v1(2893.7,754.69) C38.1 ; C36.2 2950.65,1161.42 v1(2950.87,1161.2) ; v1(2972.44,1192.91) ccw(c2963.38,1197.15) 2972.44,1201.38 C35.1 ; C43.1 v1(3228.35,435.18) ; C46.1 v1(3267.72,1051.18) ; C45.2 3389.17,314.96 ccw(c3393.4,324.02) v1(3397.64,314.96) ; C48.2 v1(3437.01,925.2) ; v1(3425.2,340.69) C44.1 ; v1(3464.57,956.69) C47.1
  Int2 (PWR) w8: v1(275.59,267.72) v1@275.59,269.13
  other v2: 287.4,131.89 255.91,163.39 318.9,163.39 287.4,194.88
H_INT: U8.A1 | length 48.6
  Top Layer w5: v1(1801.18,924.68) 1814.96,910.9 U8.A1
I2C_CH1_SCK: RN1.7 U1.A3 U2.A3 U17.2 | length 1216.8
  Top Layer w5: U1.A3 311.02,1068.9 v1(324.8,1082.68) ; U2.A3 330.71,452.9 v1(344.49,466.68)
  Top Layer w8: v1(98.43,208.66) 121.13,185.96 129,185.96 129.92,185.04 153.54,185.04 161.42,192.91 U17.2
  Bottom Layer w6: v1(98.43,208.66) 111.69,208.66 ccw(c111.69,214.66) 115.91,210.4 214.81,309.3 ccw(c210.54,313.51) 216.54,313.51 216.54,336.1 cw(c222.54,336.1) 218.29,340.34 344.49,466.54 v1(344.49,466.68) 344.49,1060.51 ccw(c338.49,1060.51) 342.75,1064.73 v1(324.8,1082.68)
I2C_CH1_SDA: RN1.8 U1.A2 U2.A2 U17.1 | length 1159.2
  Top Layer w5: U1.A2 v1(295.28,1082.68) ; U2.A2 v1(314.96,466.68)
  Top Layer w8: v1(114.17,240.16) 120.36,238.13 cw(c117.86,230.53) 125,234.14 131.65,220.98 cw(c124.52,217.37) 132.12,214.88 129.92,208.19 160.94,208.19 165.35,212.6 U17.1
  Bottom Layer w6: v1(114.17,240.16) 115.74,241.72 127.48,241.72 203.39,317.63 ; 203.32,317.58 cw(c207.28,313.07) 203.39,317.63 ; v1(295.28,1082.68) 323.04,1054.91 cw(c318.8,1050.67) 324.8,1050.7 ; 323.05,474.76 v1(314.96,466.68) 312.52,464.23 312.52,454.25 207.26,348.99 ccw(c211.54,344.78) 205.54,344.82 205.54,322.23 cw(c199.54,322.23) 203.39,317.63 ; 323.07,474.79 323.6,475.41 ccw(c318.8,479.01) 324.8,479.01 324.8,1050.67
I2C_CH2_SCK: RN2.1 U5.A3 U6.A3 U17.17 | length 1421.4
  Top Layer w5: U5.A3 901.57,336.9 v1(915.35,350.68) 915.35,438.98 1078.74,602.36 1354.11,602.36 v1(1387.8,568.68) 1374.02,554.9 U6.A3
  Top Layer w8: U17.17 362.5,193.21 378.25,193.21 389.76,204.72 402.08,204.72 405.51,208.15 406.99,208.15 411.35,212.52 411.35,213.99 419.86,222.5 431.16,222.5 v1(433.07,224.41)
  Bottom Layer w6: v1(433.07,224.41) 449.41,224.41 cw(c449.44,216.41) 455.02,222.14 cw(c449.44,216.41) 455.07,222.1 467.73,209.43 ; 467.75,209.41 ccw(c471.97,213.68) 471.97,207.68 854.8,207.68 ccw(c854.8,213.68) 859.04,209.43 913.03,263.42 ccw(c908.79,267.67) 913.1,263.49 ccw(c907.35,269.06) 915.35,269.06 v1(915.35,350.68)
I2C_CH2_SDA: RN2.2 U5.A2 U6.A2 U17.16 | length 1524.3
  Top Layer w5: U5.A2 v1(885.83,350.68) ; U6.A2 v1(1358.27,568.68)
  Top Layer w8: U17.16 362.5,173.53 378.25,173.53 389.76,185.04 405.51,185.04 421.95,185.04 425.2,188.29 426.32,188.29 434.88,196.85 v1(437.01,196.85)
  Bottom Layer w6: v1(437.01,196.85) 442.54,191.32 ccw(c448.2,196.98) 448.2,188.98 878.58,188.98 ccw(c878.58,196.98) 884.23,191.32 946.5,253.59 ccw(c940.82,259.22) 948.82,259.22 948.82,358.27 930.76,376.33 911.48,376.33 v1(885.83,350.68) 885.83,440.94 1003.94,559.06 1295.28,559.06 1311.02,543.31 1332.9,543.31 v1(1358.27,568.68)
I2C_CH3_SCK: RN1.5 U3.A3 U4.A3 U17.4 | length 1918.3
  Top Layer w5: U3.A3 800,1304.9 v1(813.78,1318.68) ; U4.A3 881.89,866.9 v1(895.67,880.68)
  Top Layer w8: v1(98.43,149.61) 101.67,149.61 105.61,145.67 129.92,145.67 173.23,145.67 181.1,153.54 U17.4
  Bottom Layer w6: v1(98.43,149.61) 116.43,167.61 116.43,175.48 242.34,301.39 cw(c246.58,297.15) 246.58,303.15 284.92,303.15 ccw(c284.92,309.15) 289.14,304.89 380.15,395.9 cw(c384.37,391.64) 384.37,397.64 627.44,397.64 ccw(c627.44,403.64) 631.68,399.4 895.67,663.39 v1(895.67,880.68) 895.67,1037.2 ccw(c885.67,1037.2) 892.74,1044.27 816.67,1120.34 cw(c823.78,1127.37) 813.78,1127.31 v1(813.78,1318.68)
I2C_CH3_SDA: RN1.6 U3.A2 U4.A2 U17.3 | length 1859.3
  Top Layer w5: U3.A2 v1(784.25,1318.68) ; U4.A2 v1(866.14,880.68)
  Top Layer w8: v1(98.43,177.17) 110.24,165.35 129.92,165.35 173.23,165.35 181.1,173.23 U17.3
  Bottom Layer w6: v1(98.43,177.17) 102.21,177.17 107.58,182.54 107.92,182.54 238.59,313.2 cw(c242.83,308.96) 242.83,314.96 269.17,314.96 ccw(c269.17,320.96) 273.39,316.7 368.34,411.65 cw(c372.56,407.39) 372.56,413.39 603.81,413.39 ccw(c603.81,419.39) 608.06,415.14 866.14,673.23 v1(866.14,880.68) 866.14,1023.62 787.18,1102.58 cw(c794.25,1109.65) 784.25,1109.65 v1(784.25,1318.68)
I2C_CH4_SCK: RN1.3 U7.A3 U8.A3 U17.6 | length 3096.1
  Top Layer w5: U7.A3 1353.75,1204.9 v1(1367.53,1218.68) ; U8.A3 1846.46,910.9 v1(1860.24,924.68)
  Top Layer w8: v1(98.43,97.05) 100.3,97.05 109.55,106.3 129.92,106.3 177.17,106.3 185.04,114.17 U17.6
  Bottom Layer w6: v1(98.43,97.05) 110.31,97.05 ccw(c110.31,103.05) 114.53,98.79 250.23,234.48 cw(c254.45,230.22) 254.45,236.22 340.03,236.22 ccw(c340.03,242.22) 344.26,237.96 470.68,364.38 cw(c474.93,360.14) 474.93,366.14 662.87,366.14 ccw(c662.87,372.14) 667.11,367.9 968.5,669.29 1736.02,669.29 ccw(c1736.02,679.29) 1743.07,672.2 1857.34,786.48 ccw(c1850.24,793.51) 1860.24,793.51 v1(1860.24,924.68) 1860.24,1060.82 ; v1(1367.53,1218.68) 1432.66,1153.54 1767.51,1153.54 cw(c1767.51,1143.54) 1774.55,1150.65 1857.33,1067.87 cw(c1850.24,1060.82) 1860.24,1060.86
I2C_CH4_SDA: RN1.4 U7.A2 U8.A2 U17.5 | length 3036.7
  Top Layer w5: U7.A2 v1(1338,1218.68) ; U8.A2 v1(1830.71,924.68)
  Top Layer w8: v1(98.43,122.05) 101.67,122.05 105.61,125.98 129.92,125.98 173.23,125.98 181.1,133.86 U17.5
  Bottom Layer w6: v1(98.43,122.05) 127.43,151.05 127.43,170.92 246.08,289.58 cw(c250.33,285.34) 250.33,291.34 300.66,291.34 ccw(c300.66,297.34) 304.91,293.1 391.94,380.13 cw(c396.19,375.89) 396.19,381.89 647.12,381.89 ccw(c647.12,387.89) 651.35,383.63 970.7,702.99 cw(c974.93,698.72) 974.93,704.72 1716.33,704.72 ccw(c1716.33,714.72) 1723.4,707.65 1830.71,814.96 v1(1830.71,924.68) 1830.71,1035.43 1754.9,1111.24 ccw(c1747.83,1104.17) 1747.83,1114.17 1421.4,1114.17 cw(c1421.47,1124.17) 1414.44,1117.06 1340.91,1190.58 cw(c1348,1197.64) 1338,1197.64 v1(1338,1218.68)
I2C_CH5_SCK: RN2.3 U9.A3 U10.A3 U17.15 | length 2392.8
  Top Layer w5: U9.A3 1846.46,336.9 v1(1860.24,350.68) 1860.24,462.6 2003.94,606.3 2295.05,606.3 v1(2332.68,568.68) 2318.9,554.9 U10.A3
  Top Layer w8: U17.15 362.5,153.84 378.25,153.84 389.76,165.35 405.51,165.35 425.89,165.35 429.82,169.29 v1(433.07,169.29)
  Bottom Layer w6: v1(433.07,169.29) 1773.11,169.29 ccw(c1773.11,175.29) 1777.35,171.05 1860.24,253.94 v1(1860.24,350.68)
I2C_CH5_SDA: RN2.4 U9.A2 U10.A2 U17.14 | length 2523.6
  Top Layer w5: U9.A2 v1(1830.71,350.68) ; U10.A2 v1(2303.15,568.68)
  Top Layer w8: U17.14 377.58,133.86 ccw(c377.54,141.86) 382.32,135.44 cw(c390.14,125.06) 384.14,136.6 ; 384.18,136.62 ccw(c380.37,143.65) 385.99,137.96 390.45,142.42 cw(c396.09,136.75) 396.07,144.75 404.59,144.75 405.51,145.67 429.82,145.67 433.76,141.73 v1(437.01,141.73)
  Bottom Layer w6: v1(437.01,141.73) 1791.34,141.73 1889.76,240.16 1889.76,370.08 1877.95,381.89 1861.92,381.89 v1(1830.71,350.68) 1830.71,452.76 1988.19,610.24 2261.59,610.24 v1(2303.15,568.68)
I2C_CH6_SCK: RN2.5 U13.A3 U14.A3 U17.13 | length 3464.8
  Top Layer w5: U14.A3 2771.65,336.9 v1(2785.43,350.68) 2785.43,442.91 3003.94,661.42 3003.94,858.27 2981.53,880.68 v1(2824.8,880.68) 2811.02,866.9 U13.A3
  Top Layer w8: U17.13 372.12,114.17 ccw(c372.08,122.17) 377.3,116.11 cw(c385.83,106.3) 382.49,118.86 382.55,118.88 ccw(c380.33,126.57) 385.96,120.88 387.81,122.73 cw(c393.46,117.06) 393.46,125.06 399.67,125.06 405.51,125.98 425.2,125.98 v1(437.01,114.17)
  Bottom Layer w6: v1(437.01,114.17) 2634.48,114.17 ccw(c2634.48,122.17) 2640.14,116.52 2785.43,261.81 v1(2785.43,350.68)
I2C_CH6_SDA: RN2.6 U13.A2 U14.A2 U17.12 | length 3394.3
  Top Layer w5: U14.A2 v1(2755.91,350.68) ; U13.A2 v1(2795.28,880.68)
  Top Layer w8: U17.12 336.91,80.77 336.91,79.79 ccw(c344.91,79.79) 339.25,74.14 340.02,73.36 ccw(c345.67,79.03) 345.67,71.03 347.24,71.03 ccw(c347.24,79.03) 352.89,73.36 385.83,106.3 405.51,106.3 406.43,105.38 418.24,105.38 435.56,88.06 v1(438.66,88.06)
  Bottom Layer w6: v1(438.66,88.06) 2643.18,88.06 2814.96,259.84 2814.96,370.08 2803.15,381.89 2763.78,381.89 2755.91,374.02 ; v1(2755.91,350.68) 2755.91,374.02 ; v1(2795.28,880.68) 2795.28,751.97 2755.91,712.6 2755.91,374.02
I2C_CH7_SCK: RN1.1 U11.A3 U12.A3 U17.8 | length 3766.7
  Top Layer w5: U11.A3 2337.75,1204.9 v1(2351.53,1218.68) ; U12.A3 2895.75,1304.9 v1(2909.53,1318.68)
  Top Layer w8: v1(129.92,35.43) 129.92,63.5 153.03,63.5 178.76,37.78 ccw(c184.42,43.43) 184.42,35.43 232.91,35.43 ccw(c232.91,43.43) 238.56,37.77 255.56,54.77 ccw(c249.87,60.4) 257.87,60.4 U17.8
  Bottom Layer w6: v1(129.92,35.43) 318.9,35.43 393.7,110.24 393.7,212.6 513.99,332.89 cw(c518.23,328.65) 518.23,334.65 698.3,334.65 ccw(c698.3,340.65) 702.53,336.38 970.7,604.56 cw(c974.93,600.3) 974.93,606.3 980.52,606.3 1893.5,606.3 ccw(c1893.5,616.3) 1900.55,609.21 2348.63,1057.3 ccw(c2341.53,1064.33) 2351.53,1064.33 v1(2351.53,1218.68) 2809.53,1218.68 v1(2909.53,1318.68)
I2C_CH7_SDA: RN1.2 U11.A2 U12.A2 U17.7 | length 3645
  Top Layer w5: U11.A2 v1(2322,1218.68) ; U12.A2 v1(2880,1318.68)
  Top Layer w8: v1(98.43,70.87) 99.11,70.87 114.52,86.28 129.58,86.28 129.92,86.61 161.42,86.61 190.57,57.46 ccw(c196.23,63.12) 196.23,55.12 221.1,55.12 ccw(c221.1,63.12) 226.75,57.46 238.19,68.9 U17.7
  Bottom Layer w6: v1(98.43,70.87) 114.17,70.87 267.72,224.41 387.28,224.41 ccw(c387.28,230.41) 391.5,226.15 513.99,348.64 cw(c518.23,344.39) 518.23,350.39 682.76,350.39 ccw(c682.76,356.39) 687,352.15 972.65,637.8 1869.87,637.8 ccw(c1869.87,647.8) 1876.94,640.72 2322,1085.78 v1(2322,1218.68) 2343.48,1240.16 2801.48,1240.16 v1(2880,1318.68)
I2C_CH8_SCK: RN2.7 U15.A3 U16.A3 U17.11 | length 4226.5
  Top Layer w5: U15.A3 3342.52,452.9 v1(3356.3,466.68) 3356.3,683.07 3531.5,858.27 3531.5,1047.24 3496.06,1082.68 v1(3395.67,1082.68) 3381.89,1068.9 U16.A3
  Top Layer w8: U17.11 316.93,64.28 ccw(c324.93,64.34) 319.23,58.72 324.47,53.48 ccw(c330.09,59.18) 330.03,51.18 351.02,51.18 ccw(c351.02,59.18) 356.67,53.52 387.43,84.28 cw(c393.08,78.61) 393.04,86.61 ; 393.08,86.61 405.51,86.61 406.43,85.69 412.93,85.69 417.79,80.83 419.08,80.83 424.35,75.56 424.35,74.27 v1(437.01,61.61)
  Bottom Layer w6: v1(437.01,61.61) 3057.68,61.61 3356.3,360.24 v1(3356.3,466.68)
I2C_CH8_SDA: RN2.8 U15.A2 U16.A2 U17.10 | length 4217.7
  Top Layer w5: U15.A2 v1(3326.77,466.68) ; U16.A2 v1(3366.14,1082.68)
  Top Layer w8: U17.10 297.24,68.9 ccw(c329.11,68.9) 329.11,37.03 364.42,37.03 ccw(c364.42,45.03) 370.08,39.37 390.25,59.54 401.59,59.54 405.51,63.46 405.51,43.31 415,33.81 ccw(c420.64,39.5) 420.64,31.5 v1(437.01,31.5)
  Bottom Layer w6: v1(437.01,31.5) 3078.74,31.5 3381.89,334.65 3381.89,484.25 3366.14,500 3338.58,500 3326.77,488.19 ; v1(3326.77,466.68) 3326.77,488.19 ; v1(3366.14,1082.68) 3366.14,940.94 3326.77,901.57 3326.77,488.19
I_INT: U9.A1 | length 48.6
  Top Layer w5: v1(1801.18,350.68) 1814.96,336.9 U9.A1
J_INT: U10.A1 | length 48.3
  Top Layer w5: v1(2273.77,568.34) 2273.96,568.34 2287.4,554.9 U10.A1
K_INT: U11.A1 | length 48.6
  Top Layer w5: v1(2292.47,1218.68) 2306.25,1204.9 U11.A1
L_INT: U12.A1 | length 48.6
  Top Layer w5: v1(2850.47,1318.68) 2864.25,1304.9 U12.A1
M_INT: U13.A1 | length 48.6
  Top Layer w5: v1(2765.75,880.68) 2779.53,866.9 U13.A1
N_INT: U14.A1 | length 48.6
  Top Layer w5: v1(2726.38,350.68) 2740.16,336.9 U14.A1
NetC3_1: C3.1 U1.C2 | length 84.7
  Top Layer w5: U1.C2 295.28,929.13 C3.1
NetC6_1: C6.1 U2.C2 | length 78.9
  Top Layer w5: U2.C2 314.96,342.52 318.9,338.58 C6.1
NetC9_1: C9.1 U3.C2 | length 85.8
  Top Layer w5: U3.C2 784.25,1188.19 791.34,1181.1 C9.1
NetC12_1: C12.1 U4.C2 | length 82
  Top Layer w5: C12.1 858.27,730.32 858.27,748.03 866.14,755.91 U4.C2
NetC15_1: C15.1 U5.C2 | length 81
  Top Layer w5: U5.C2 885.83,224.41 889.76,220.47 C15.1
NetC18_1: C18.1 U6.C2 | length 82.5
  Top Layer w5: U6.C2 1358.27,444.88 1362.2,440.94 C18.1
NetC21_1: C21.1 U7.C2 | length 83.1
  Top Layer w5: U7.C2 1338,1087.2 1342.52,1082.68 C21.1
NetC24_1: C24.1 U8.C2 | length 83.4
  Top Layer w5: C24.1 1830.71,769.68 U8.C2
NetC27_1: C27.1 U9.C2 | length 81
  Top Layer w5: U9.C2 1830.71,228.35 1834.65,224.41 C27.1
NetC30_1: C30.1 U10.C2 | length 82.5
  Top Layer w5: U10.C2 2303.15,440.95 2307.09,437.01 C30.1
NetC33_1: C33.1 U11.C2 | length 83.2
  Top Layer w5: U11.C2 2322,1087.45 2326.77,1082.68 C33.1
NetC36_1: C36.1 U12.C2 | length 83.7
  Top Layer w5: C36.1 2877.95,1181.1 2880,1183.15 U12.C2
NetC39_1: C39.1 U13.C2 | length 79.5
  Top Layer w5: U13.C2 2795.28,755.91 2799.21,751.97 C39.1
NetC42_1: C42.1 U14.C2 | length 81
  Top Layer w5: U14.C2 2755.91,224.41 2759.84,220.47 C42.1
NetC45_1: C45.1 U15.C2 | length 78.9
  Top Layer w5: U15.C2 3326.77,338.58 3330.71,334.65 C45.1
NetC48_1: C48.1 U16.C2 | length 84.7
  Top Layer w5: U16.C2 3366.14,956.69 3370.08,952.76 C48.1
O_INT: U15.A1 | length 48.6
  Top Layer w5: v1(3297.24,466.68) 3311.02,452.9 U15.A1
P_INT: U16.A1 | length 48.6
  Top Layer w5: v1(3336.61,1082.68) 3350.39,1068.9 U16.A1
PALM_I2C_SCL: J1.20 R1.1 U17.19 | length 781.1
  Top Layer w8: J1.20 157.48,434.06 191.72,468.3 215.03,468.3 215.24,468.5 v1(254.92,468.5) ; R1.1@262.8,533.46 264.76,531.5 400.23,531.5 cw(c400.23,523.5) 405.89,529.15 473.26,461.78 cw(c467.6,456.13) 475.6,456.13 475.6,324.8 cw(c462.6,324.8) 471.76,315.58 440.79,284.61 cw(c435.14,290.28) 435.14,282.28 361.77,282.28 ccw(c361.77,274.28) 356.12,279.94 v1(341.93,265.75) 341.93,262.5 336.61,257.19 U17.19
  Top Layer w10: v1(254.92,468.5) 254.92,471.21 262.8,479.08 R1.1@262.8,533.46
  Int2 (PWR) w10: v1(254.92,468.5) v1@255.71,467.72
PALM_I2C_SDA: J1.16 R2.1 U17.20 | length 790.2
  Top Layer w8: J1.16 209.65,481.3 v1(229.33,500.98) 229.33,510.21 229.33,531.5 R2.1@227.36,533.46 ; v1(295.28,501.97) 400.23,501.97 cw(c400.23,493.97) 405.89,499.63 460.26,445.26 cw(c454.6,439.6) 462.6,439.6 462.6,328.12 cw(c454.6,328.12) 460.25,322.45 435.4,297.61 cw(c429.76,303.28) 429.76,295.28 344.59,295.28 316.93,267.62 v1(316.93,265.75) U17.20
  Bottom Layer w8: 227,570.7 cw(c221.33,565.06) 229.33,565.1 ; 229.33,565.06 229.33,510.21 v1(229.33,500.98) 230.31,501.97 v1(295.28,501.97)
PALM_RESET: J1.10 R6.1 U17.24 | length 452.6
  Top Layer w8: J1.10 99.17,552.17 94.49,547.48 94.49,357.28 115.16,336.61 v1(144.68,336.61) R6.1 ; R6.1@145.67,302.39 145.67,272.01 ccw(c153.67,272.01) 148,266.37 173.87,240.5 ccw(c179.49,246.19) 179.45,238.19 U17.24

## Polygon pours and split planes (outlines as drawn)
GND on Top Layer "GND_POUR" (solid, pour order 18): 154.76,4.49 3499.51,4.49 ccw(c3499.51,122.78) 3617.35,112.47 3717.18,1253.6 3712.92,1292.54 3694.08,1326.88 3663.53,1351.4 3625.92,1362.36 2420.81,1467.8 1216.09,1467.8 10.98,1362.36 -26.62,1351.4 -57.17,1326.88 -76.01,1292.54 -80.28,1253.6 18.04,129.76 ccw(c154.75,141.72)
3V3 on Top Layer "3V3_L01_P000" (solid, pour order 0): 62.99,500 94.49,500 cw(c94.49,492.13) 102.36,492.13 102.36,489.82 ccw(c125.31,489.82) 109.08,473.59 112.54,470.13 cw(c89.6,447.19) 122.05,447.19 122.05,381.89 cw(c110.24,381.89) 110.24,370.08 86.61,370.08 cw(c86.61,381.89) 74.8,381.89 74.8,459.28 70.79,463.3 ccw(c64.03,456.55) 62.61,465.99 cw(c61.64,472.44) 55.12,472.44 55.12,492.13 cw(c62.99,492.13)
3V3 on Int2 (PWR) "3V3_L03_P017" (solid, pour order 17): 443.05,531.49 255.9,531.5 ccw(c255.9,307.69) 32.1,307.69 ccw(c659,433.04) 37.5,283.19 cw(c-27.66,267.46) 39.37,267.44 39.37,165.63 ccw(c201.63,165.63) 86.89,50.9 ccw(c114.73,78.74) 114.73,39.37 433.07,39.37 ccw(c433.07,137.8) 531.5,137.8 531.5,443.06 ccw(c443.06,443.06)
GND on Int2 (PWR) "GND_POUR" (solid, pour order 20): 154.76,4.49 3499.51,4.49 ccw(c3499.51,122.78) 3617.35,112.47 3717.18,1253.6 3712.92,1292.54 3694.08,1326.88 3663.53,1351.4 3625.92,1362.36 2420.81,1467.8 1216.09,1467.8 10.98,1362.36 -26.62,1351.4 -57.17,1326.88 -76.01,1292.54 -80.28,1253.6 18.04,129.76 ccw(c154.75,141.72)
GND on Bottom Layer "GND_L04_P021" (solid, pour order 21): 154.76,4.49 3499.51,4.49 ccw(c3499.51,122.78) 3617.35,112.47 3717.18,1253.6 3712.92,1292.54 3694.08,1326.88 3663.53,1351.4 3625.92,1362.36 2420.81,1467.8 1216.09,1467.8 10.98,1362.36 -26.62,1351.4 -57.17,1326.88 -76.01,1292.54 -80.28,1253.6 18.04,129.76 ccw(c154.75,141.72)
GND on Int1 (GND) "GND_POUR" (solid, pour order 19): 154.76,4.49 3499.51,4.49 ccw(c3499.51,122.78) 3617.35,112.47 3717.18,1253.6 3712.92,1292.54 3694.08,1326.88 3663.53,1351.4 3625.92,1362.36 2420.81,1467.8 1216.09,1467.8 10.98,1362.36 -26.62,1351.4 -57.17,1326.88 -76.01,1292.54 -80.28,1253.6 18.04,129.76 ccw(c154.75,141.72)

## Other copper
Top Layer:
  rectangle net 3V3: 59.06,629.92 98.43,736.22
  pour cut-out: 2341.68,1187.18 2302.31,1187.18 ccw(c2302.31,1179.31) 2294.44,1179.31 2294.44,1139.94 ccw(c2302.31,1139.94) 2302.31,1132.06 2341.68,1132.06 ccw(c2341.69,1139.94) 2349.56,1139.94 2349.56,1179.31 ccw(c2341.68,1179.31)
  pour cut-out: 2814.96,849.18 2775.59,849.18 ccw(c2775.59,841.31) 2767.72,841.31 2767.72,801.94 ccw(c2775.59,801.94) 2775.59,794.06 2814.96,794.06 ccw(c2814.96,801.94) 2822.83,801.94 2822.83,841.31 ccw(c2814.96,841.31)
  pour cut-out: 2899.68,1287.18 2860.31,1287.18 ccw(c2860.31,1279.31) 2852.44,1279.31 2852.44,1239.94 ccw(c2860.31,1239.94) 2860.31,1232.06 2899.68,1232.06 ccw(c2899.69,1239.94) 2907.56,1239.94 2907.56,1279.31 ccw(c2899.68,1279.31)
  pour cut-out: 3385.83,1051.18 3346.46,1051.18 ccw(c3346.46,1043.31) 3338.58,1043.31 3338.58,1003.94 ccw(c3346.46,1003.94) 3346.46,996.06 3385.83,996.06 ccw(c3385.83,1003.94) 3393.7,1003.94 3393.7,1043.31 ccw(c3385.83,1043.31)
  pour cut-out: 3346.46,435.18 3307.09,435.18 ccw(c3307.09,427.31) 3299.21,427.31 3299.21,387.94 ccw(c3307.09,387.94) 3307.09,380.06 3346.46,380.06 ccw(c3346.46,387.94) 3354.33,387.94 3354.33,427.31 ccw(c3346.46,427.31)
  pour cut-out: 2775.59,319.18 2736.22,319.18 ccw(c2736.22,311.31) 2728.35,311.31 2728.35,271.94 ccw(c2736.22,271.94) 2736.22,264.06 2775.59,264.06 ccw(c2775.59,271.94) 2783.46,271.94 2783.46,311.31 ccw(c2775.59,311.31)
  pour cut-out: 2322.83,537.18 2283.46,537.18 ccw(c2283.46,529.31) 2275.59,529.31 2275.59,489.94 ccw(c2283.46,489.94) 2283.46,482.06 2322.83,482.06 ccw(c2322.83,489.94) 2330.71,489.94 2330.71,529.31 ccw(c2322.83,529.31)
  pour cut-out: 1850.39,319.18 1811.02,319.18 ccw(c1811.02,311.31) 1803.15,311.31 1803.15,271.94 ccw(c1811.02,271.94) 1811.02,264.06 1850.39,264.06 ccw(c1850.39,271.94) 1858.27,271.94 1858.27,311.31 ccw(c1850.39,311.31)
  pour cut-out: 1377.95,537.18 1338.58,537.18 ccw(c1338.58,529.31) 1330.71,529.31 1330.71,489.94 ccw(c1338.58,489.94) 1338.58,482.06 1377.95,482.06 ccw(c1377.95,489.94) 1385.83,489.94 1385.83,529.31 ccw(c1377.95,529.31)
  pour cut-out: 1850.39,893.18 1811.02,893.18 ccw(c1811.02,885.31) 1803.15,885.31 1803.15,845.94 ccw(c1811.02,845.94) 1811.02,838.06 1850.39,838.06 ccw(c1850.39,845.94) 1858.27,845.94 1858.27,885.31 ccw(c1850.39,885.31)
  pour cut-out: 1357.68,1187.18 1318.31,1187.18 ccw(c1318.31,1179.31) 1310.44,1179.31 1310.44,1139.94 ccw(c1318.31,1139.94) 1318.31,1132.06 1357.68,1132.06 ccw(c1357.69,1139.94) 1365.56,1139.94 1365.56,1179.31 ccw(c1357.68,1179.31)
  pour cut-out: 803.94,1287.18 764.57,1287.18 ccw(c764.57,1279.31) 756.69,1279.31 756.69,1239.94 ccw(c764.57,1239.94) 764.57,1232.06 803.94,1232.06 ccw(c803.94,1239.94) 811.81,1239.94 811.81,1279.31 ccw(c803.94,1279.31)
  pour cut-out: 885.83,849.18 846.46,849.18 ccw(c846.46,841.31) 838.58,841.31 838.58,801.94 ccw(c846.46,801.94) 846.46,794.06 885.83,794.06 ccw(c885.83,801.94) 893.7,801.94 893.7,841.31 ccw(c885.83,841.31)
  pour cut-out: 905.51,319.18 866.14,319.18 ccw(c866.14,311.31) 858.27,311.31 858.27,271.94 ccw(c866.14,271.94) 866.14,264.06 905.51,264.06 ccw(c905.51,271.94) 913.39,271.94 913.39,311.31 ccw(c905.51,311.31)
  pour cut-out: 334.65,435.18 295.28,435.18 ccw(c295.28,427.31) 287.4,427.31 287.4,387.94 ccw(c295.28,387.94) 295.28,380.06 334.65,380.06 ccw(c334.65,387.94) 342.52,387.94 342.52,427.31 ccw(c334.65,427.31)
  pour cut-out: 314.96,1051.18 275.59,1051.18 ccw(c275.59,1043.31) 267.72,1043.31 267.72,1003.94 ccw(c275.59,1003.94) 275.59,996.06 314.96,996.06 ccw(c314.96,1003.94) 322.83,1003.94 322.83,1043.31 ccw(c314.96,1043.31)
  pour cut-out: 19.68,688.98 137.8,688.98 137.8,383.86 19.68,383.86
  pour cut-out: 370.38,239.11 209.73,241.14 207.6,81.69 370.38,81.69

## Silkscreen, mask and mechanical layers (free items; w line width, h text height)
Top Overlay:
  circle w10: c2874.02,1244.09 r175
  circle w10: c295.28,1023.62 r175
  circle w10: c791.34,1248.03 r175
  circle w10: c2795.28,826.77 r175
  circle w10: c866.14,826.77 r175
  circle w10: c1338.58,1161.42 r175
  circle w10: c2755.91,295.28 r175
  circle w10: c1830.71,295.28 r175
  circle w10: c885.83,295.28 r175
  circle w10: c3366.14,1023.62 r175
  circle w10: c3326.77,413.39 r175
  circle w10: c2303.15,511.81 r175
  circle w10: c2322.83,1161.42 r175
  circle w10: c1830.71,866.14 r175
  circle w10: c1358.27,511.81 r175
  lines w10: 177.92,304.56 cw(c314.96,413.39) 436.79,287.75
Mechanical 1:
  the board outline again, w8